# Altium PCB CTRL_Board.PcbDoc
Units mm, origin at the board's own origin, x right, y up, seen from the top; angles counter-clockwise.
Board outline 55 x 35 mm, 4 copper layers (Top Layer, 3V3, GND, Bottom Layer), stack 1.781 mm thick; 57 components, 44 nets, 231 pads, 53 vias.
Unrouted connection lines stored in the file: 6.
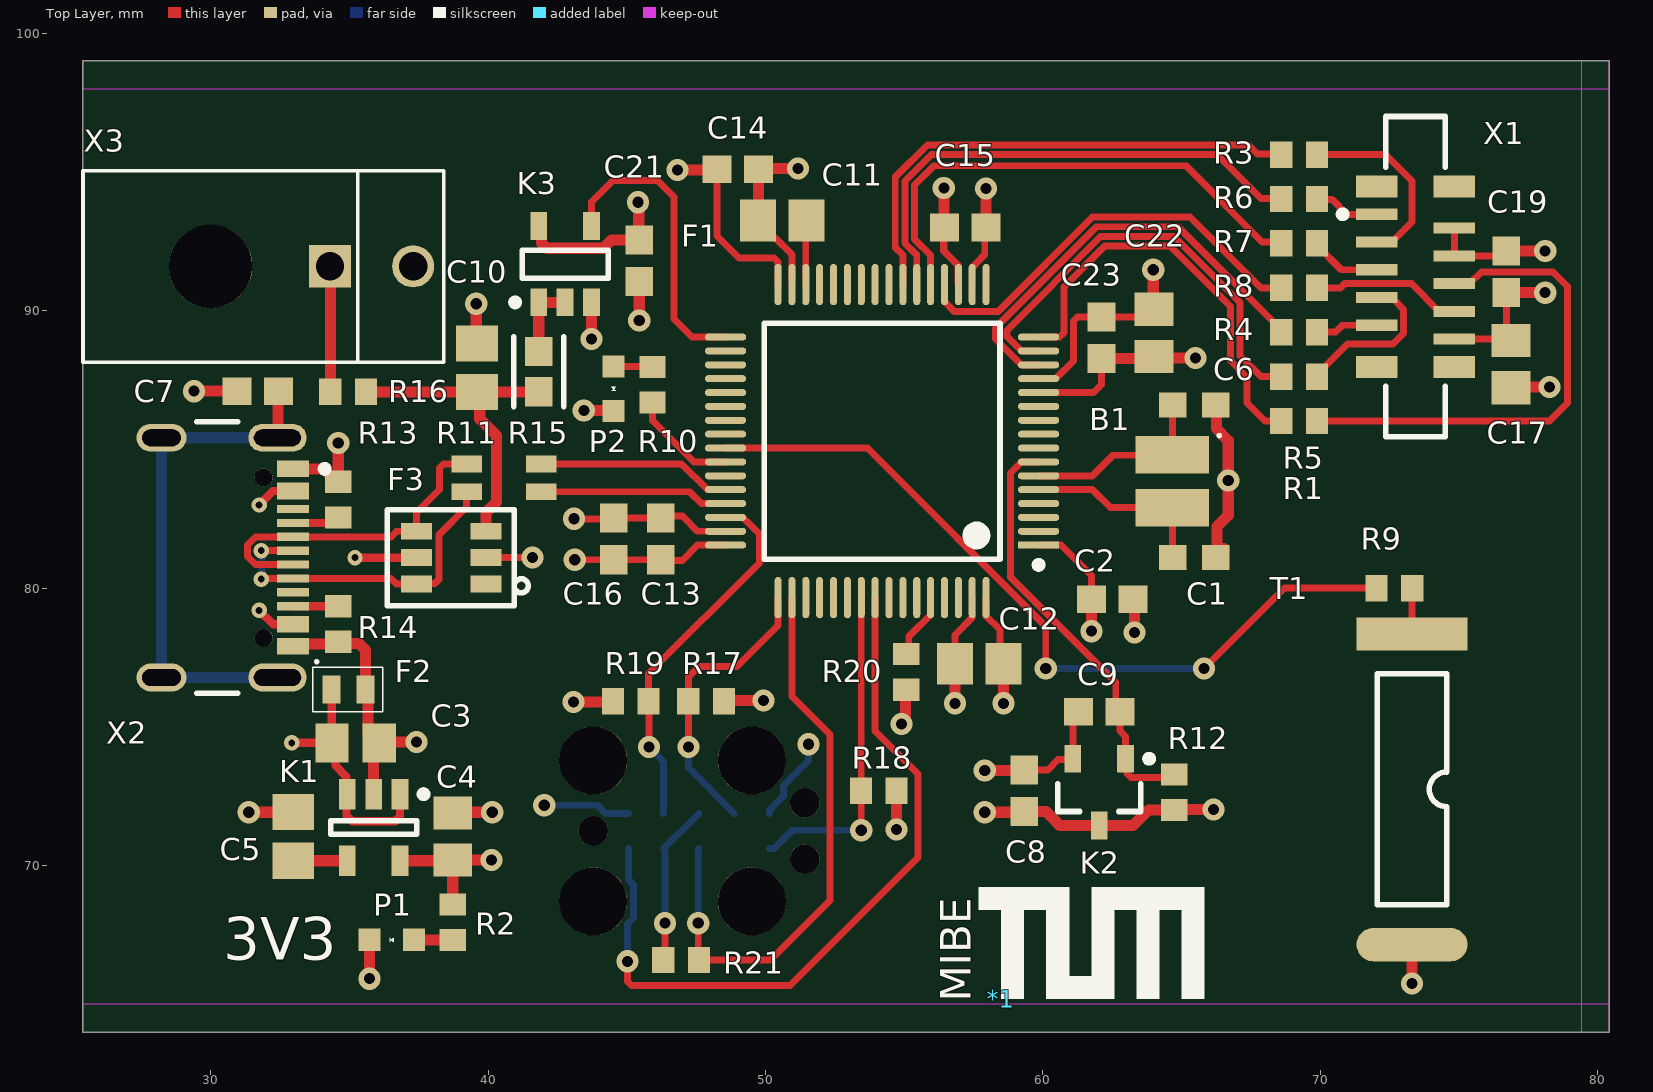
[diagram p0: Top Layer view]
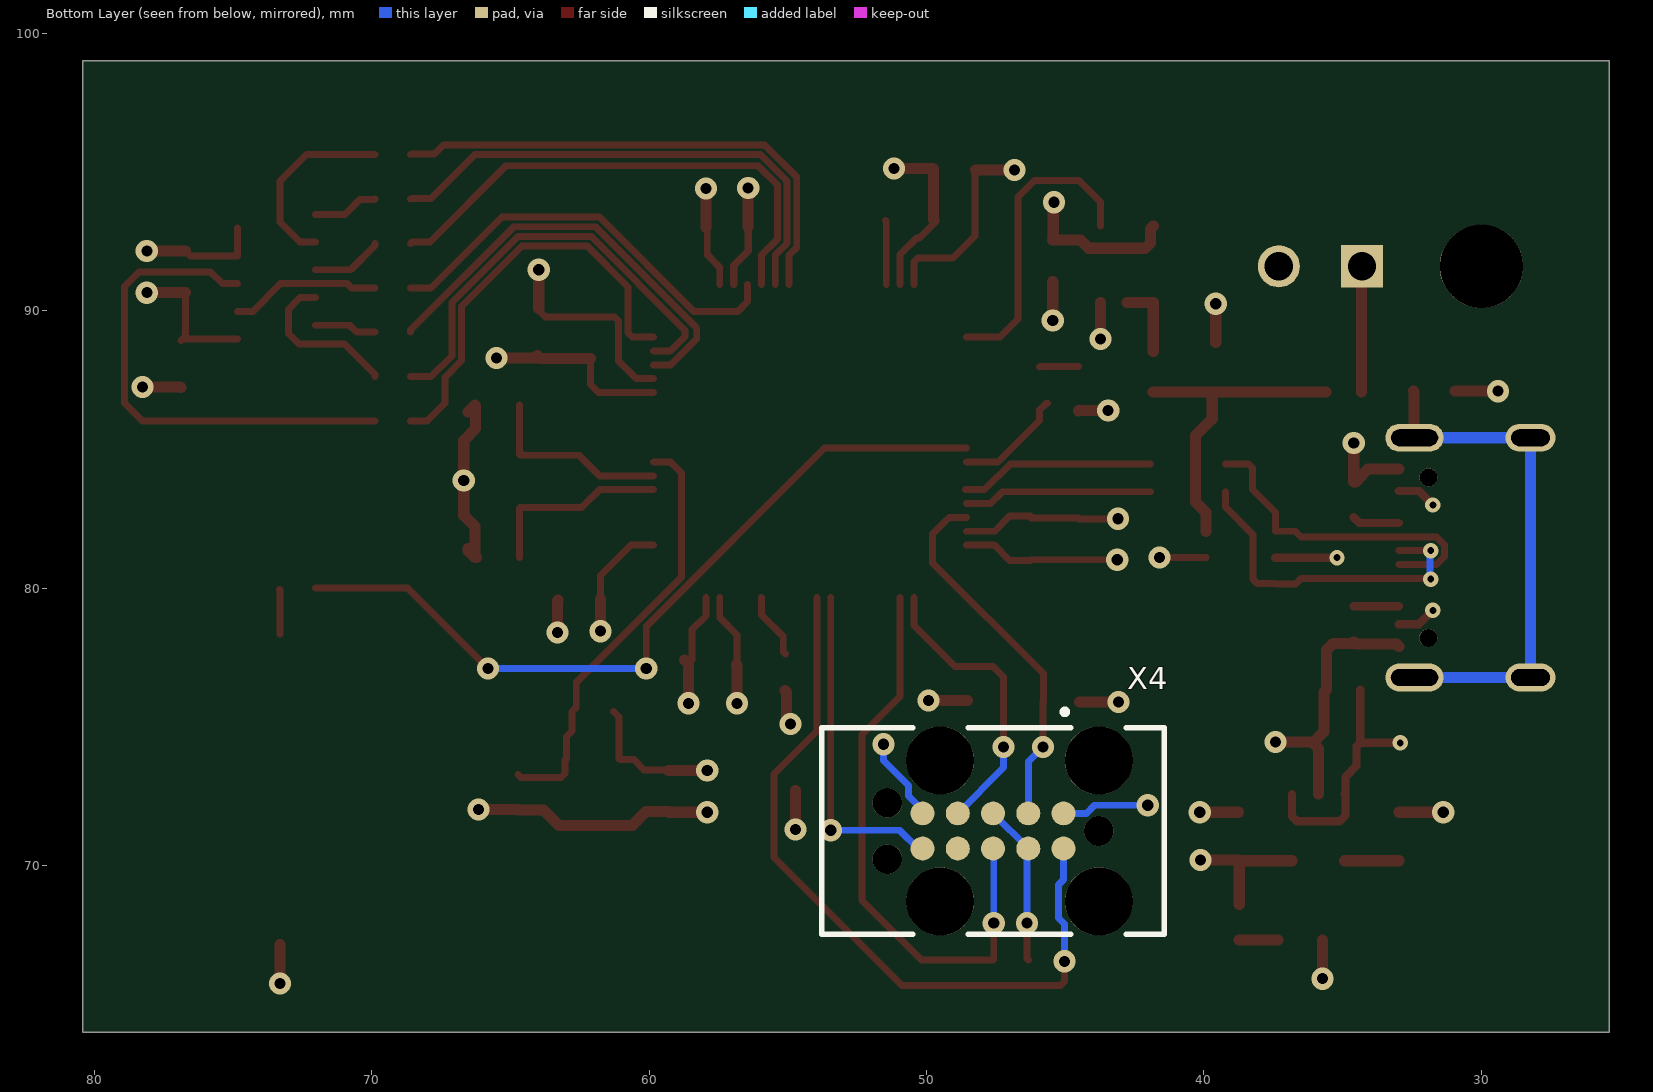
[diagram p1: Bottom Layer view, seen from below]
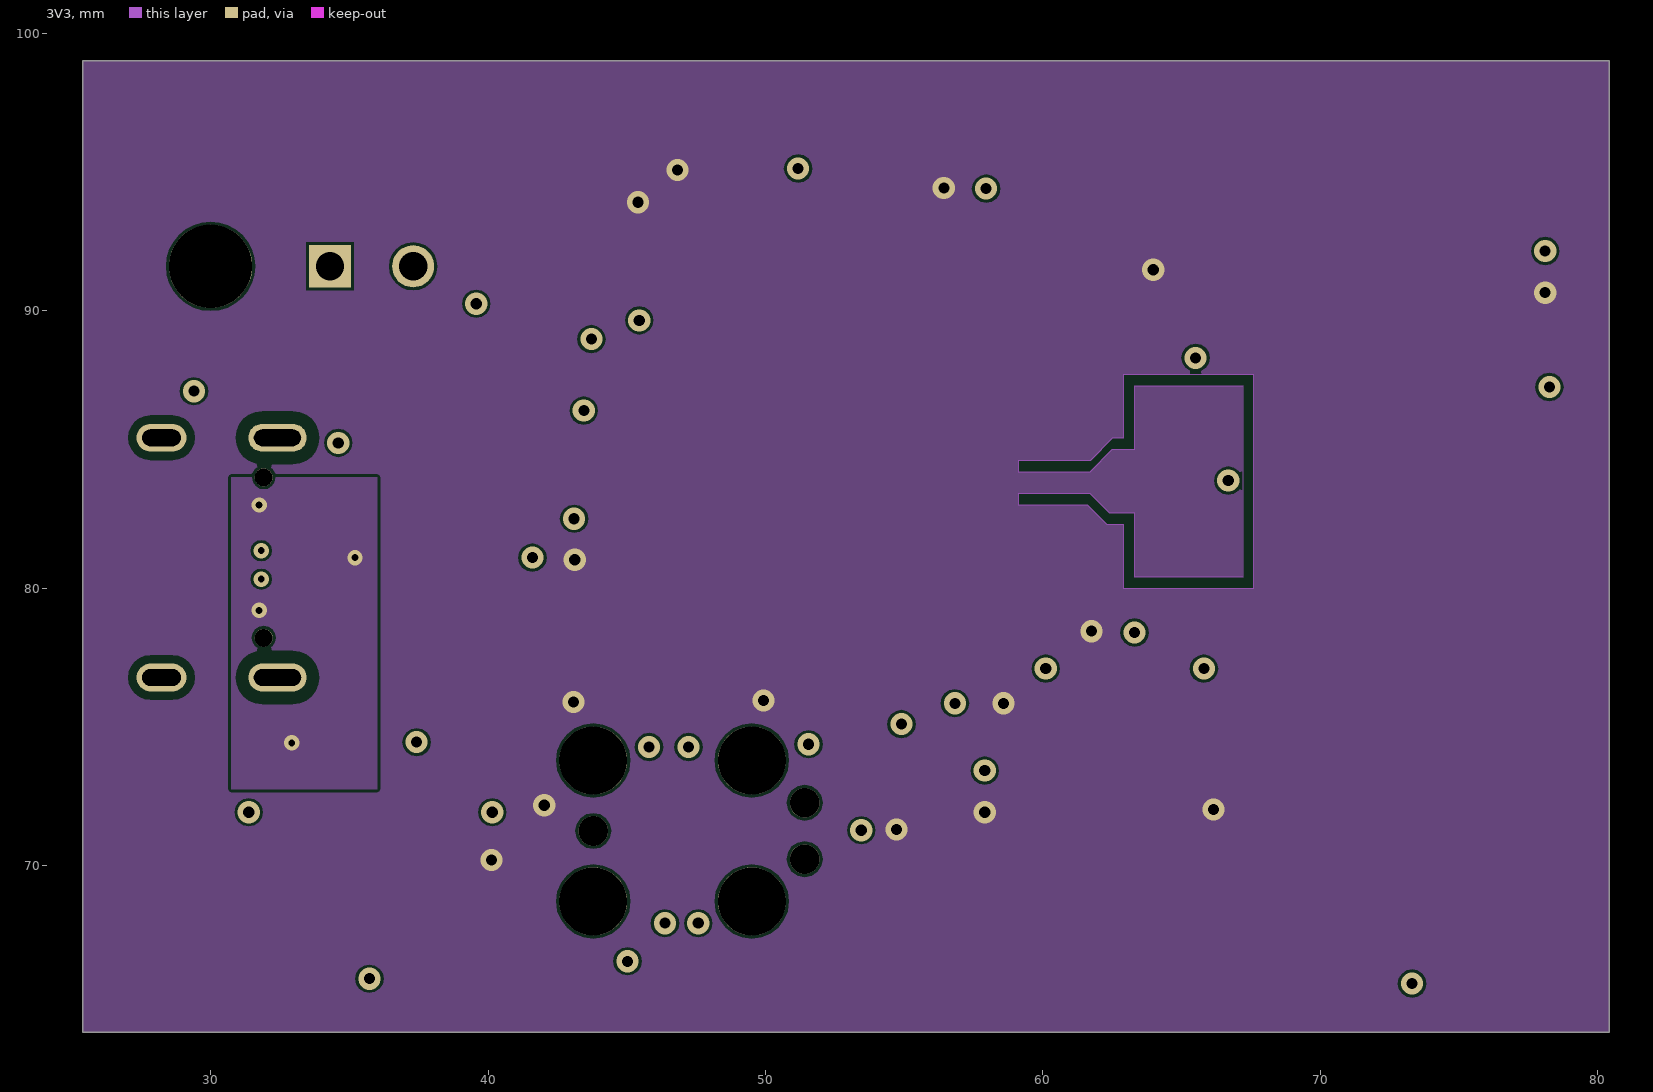
[diagram p2: 3V3]
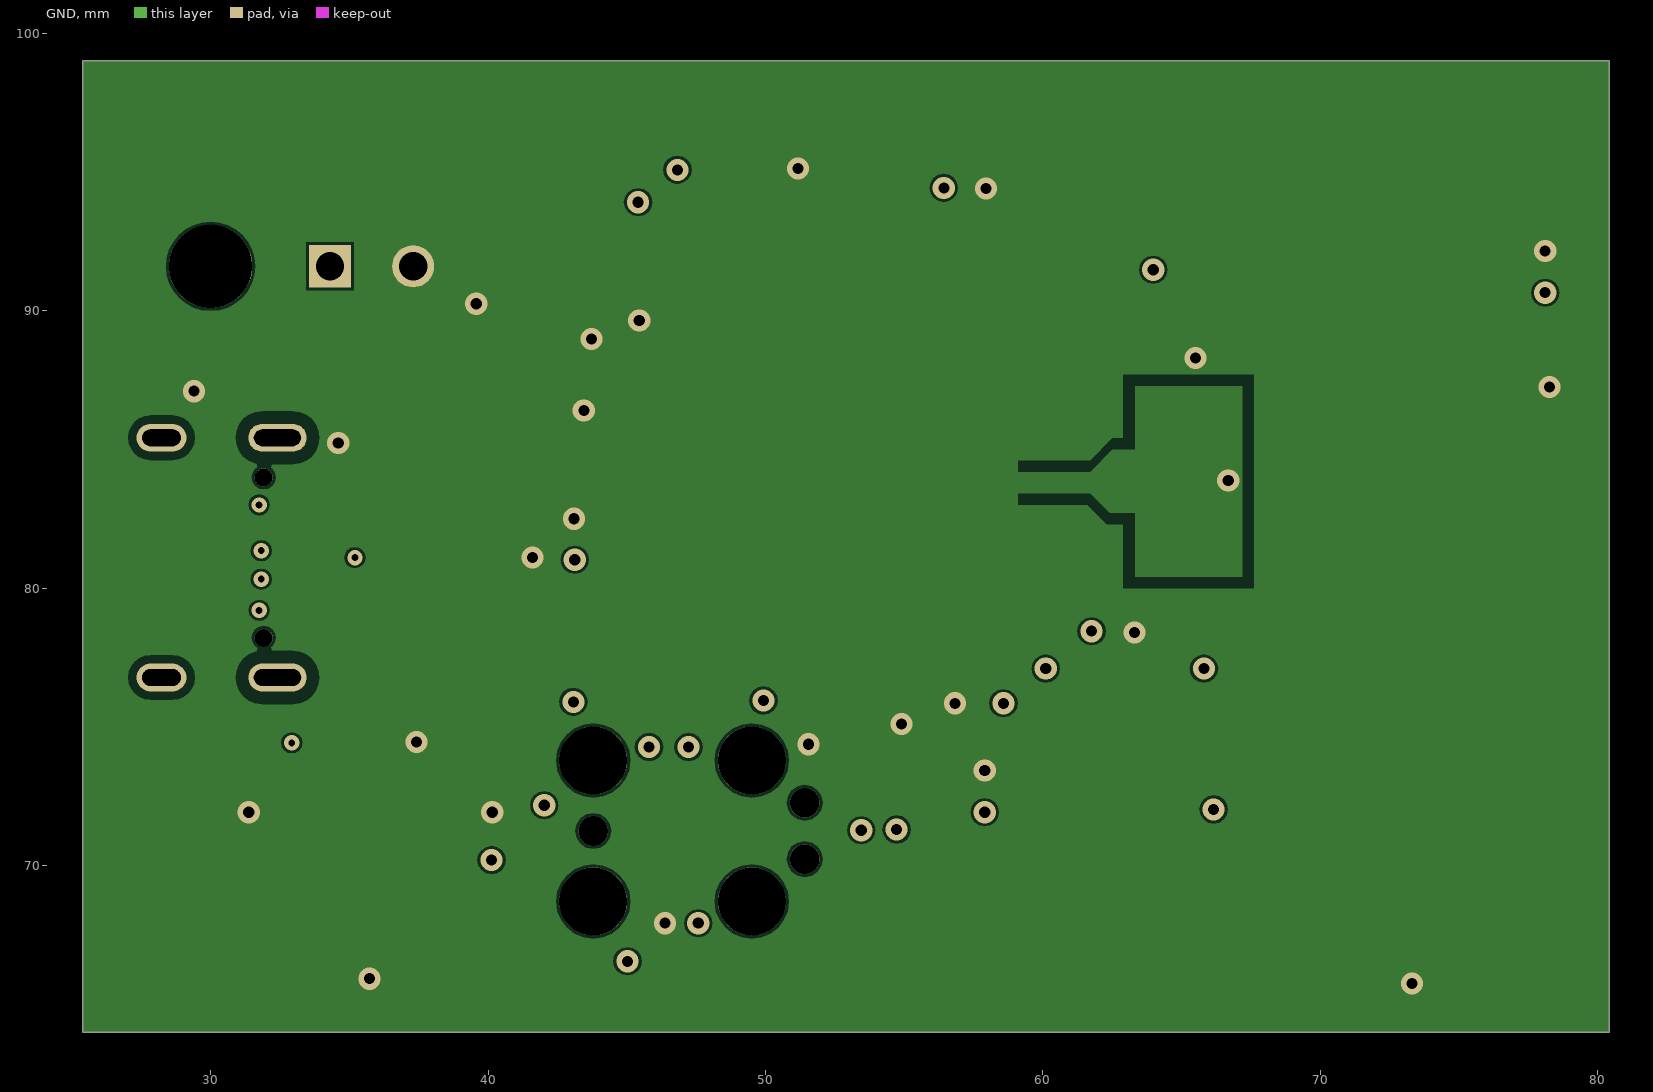
[diagram p3: GND]
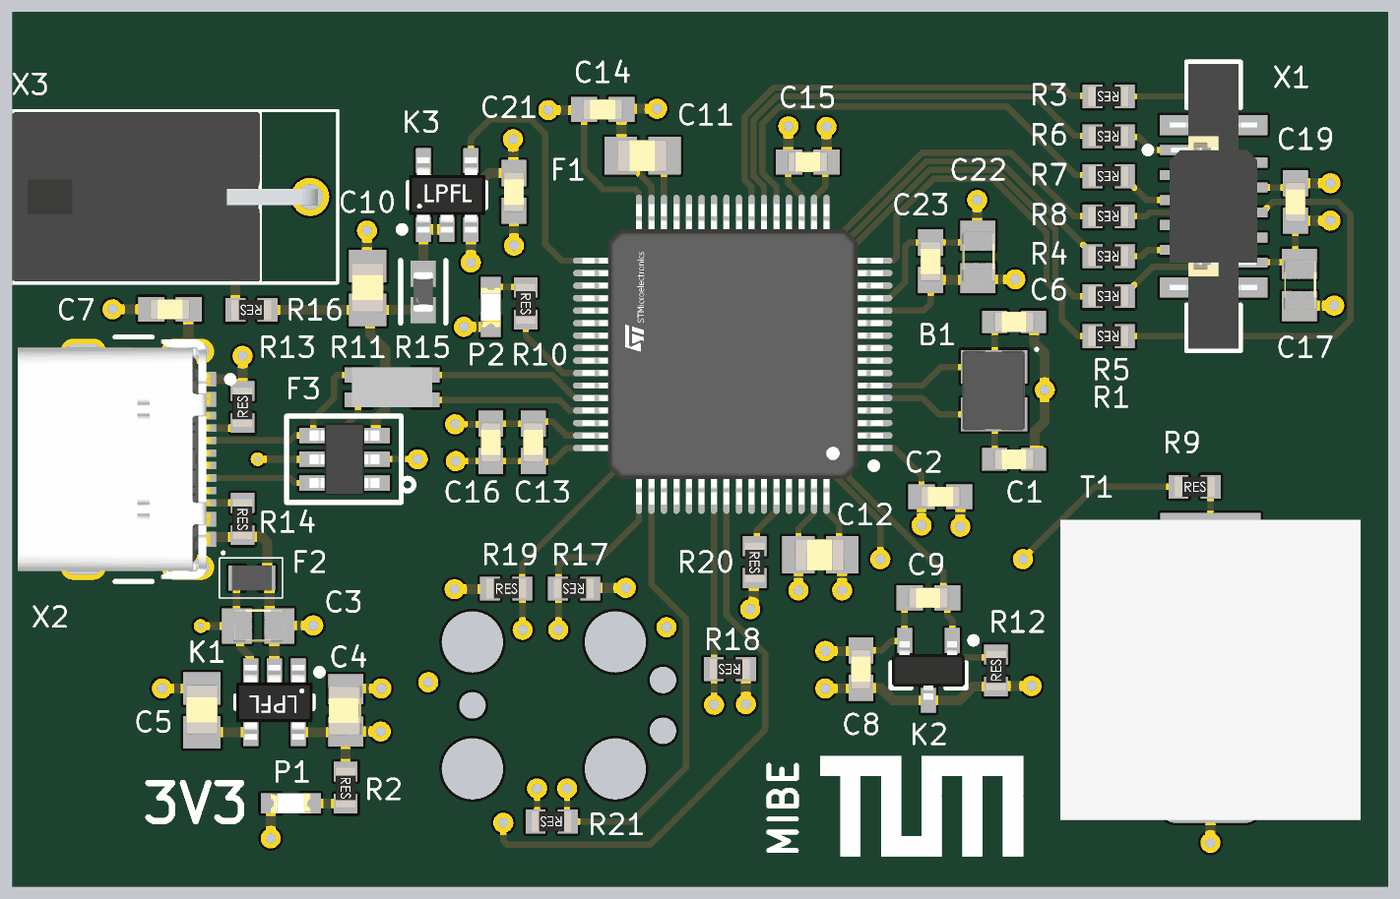
[diagram p4: 3D render of the assembled board from above, using the file's embedded part models]

## Layer stack, top to bottom
Top Solder: solder mask 0.0254, SM-001, Dk 4
Top Layer: signal copper 0.035
Dielectric 2: prepreg 0.0711, PP-006, Dk 4.1
3V3: signal copper 0.035
Dielectric 1: core 1.4986, Core-043, Dk 4.3
GND: signal copper 0.035
Dielectric 3: prepreg 0.0711, PP-006, Dk 4.1
Bottom Layer: signal copper 0.035
Bottom Solder: solder mask 0.0254, SM-001, Dk 4

## Board outline
25.4,64 80.4,64 80.4,99 25.4,99

## Design rules (kind name [scope] priority, off if disabled: settings)
Clearance [All] p1: gap=0.1 ignorepadtopadclearanceinfootprint=TRUE
DiffPairsRouting [All] p1: maxlimit=0.254 minlimit=0.254 mostfreqgap=0.254 toplayer_minwidth=0 toplayer_maxwidth=0.381 toplayer_prefwidth=0.381 midlayer1_minwidth=0 midlayer1_maxwidth=0.381 midlayer1_prefwidth=0.381 midlayer2_minwidth=0 midlayer2_maxwidth=0.381 midlayer2_prefwidth=0.381 bottomlayer_minwidth=0 bottomlayer_maxwidth=0.381 bottomlayer_prefwidth=0.381 maxuncoupledlength=12.7
HoleSize [All] p1: absolutevalues=TRUE maxlimit=10 minlimit=0.025 maxpercent=80.000 minpercent=20.000
MinimumSolderMaskSliver [All] p1: minsoldermaskwidth=0.03
PolygonConnect [All] p1: connectstyle=Direct reliefconductorwidth=0.254 reliefentries=4 polygonreliefangle="90 Angle" airgapwidth=0.254
RoutingVias [All] p1: holewidth=0 width=0 viastyle="Through Hole" minholewidth=0 minwidth=0 maxholewidth=1 maxwidth=1
SilkToSilkClearance [All] p1: silktosilkclearance=0
SilkToSolderMaskClearance [IsPad] p1: minsilkscreentomaskgap=0 clearancetoexposedcopper=TRUE
SolderMaskExpansion [All] p1: expansion=0.102 istentingtop=FALSE
Width [All] p1: maxlimit=5 minlimit=0.15 preferedwidth=0.254
25 further rules are at their usual default settings.

## Classes and differential pairs
differential pair USB: +USB_P -USB_N

## Components (designator, comment, footprint, x,y, rotation, side; value= is the part's Value field where it differs from the comment)
*1 "TUM & MIBE Logo" "TUM & MIBE Logo" 58.5,65.2 r0 top
B1 "8 MHz" DFN190P320X100-2N 64.65,83.85 r270 top
C1 "8.2 pF" CAPC1608X09N 65.45,81.1 r180 top
C2 "100n" CAPC1608X08N 62.5,79.6 r0 top
C3 "1 µF" CAPC2012X14N 35.225,74.425 r0 top
C4 "1 µF" CAPC2012X14N 38.725,71.05 r90 top
C5 "10 nF" CAPC2012X09N 32.975,71.05 r90 top
C6 "8.2 pF" CAPC1608X09N 65.45,86.6 r180 top
C7 "10 nF" "0603 (1608x90N), h = 0.9 mm" 31.7,87.1 r0 top
C8 "100n" CAPC1608X08N 59.325,72.7 r90 top
C9 "100n" CAPC1608X08N 62.025,75.55 r180 top
C10 "10 nF" CAPC2012X09N 39.6,87.95 r90 top
C11 "4.7uF" CAPC2012X09N 50.6,93.25 r180 top
C12 "4.7uF" CAPC2012X09N 57.7,77.275 r180 top
C13 "100n" CAPC1608X08N 46.225,81.775 r90 top
C14 "100n" CAPC1608X08N 49,95.1 r0 top
C15 "100n" CAPC1608X08N 57.2,93 r0 top
C16 "100n" CAPC1608X08N 44.525,81.775 r90 top
C17 "10µ" CAPC2012X14N 76.862,88.075 r270 top
C19 "100n" CAPC1608X08N 76.7,91.4 r90 top
C21 "100n" CAPC1608X08N 45.45,91.8 r270 top
C22 "10µ" CAPC2012X14N 64,89.2 r270 top
C23 "100n" CAPC1608X08N 62.108,89.025 r270 top
F1 "STM32F401RET6" LQFP-64 54.2,85.3 r180 top
F2 "uClamp0571P" DFN110P160X55-2N 34.975,76.35 r0 top
F3 "824015" SOT23_6L 38.675,81.1 r180 top
K1 "TPS73233DBVT" SOT95P280X145-5N#1 35.875,71.375 r270 top
K2 "STM1061N29WX6F" SOT95P237X112-3N 62.025,72.65 r270 top
K3 "SN74AHC1G08DBVR" SOT95P280X145-5N#2 42.775,91.675 r90 top
P1 "green" WL-SMCW_0603 36.525,67.325 r0 top
P2 "green" WL-SMCW_0603 44.525,87.19 r90 top
R1 "100R" RESC1608X05N 69.225,86.025 r180 top
R2 "3k3" RESC1608X05N 38.725,67.95 r270 top
R3 "100R" RESC1608X05N 69.225,95.625 r180 top
R4 "100R" RESC1608X05N 69.225,89.225 r180 top
R5 "100R" RESC1608X05N 69.225,87.625 r180 top
R6 "100R" RESC1608X05N 69.225,94.025 r180 top
R7 "100R" RESC1608X05N 69.225,92.425 r180 top
R8 "100R" RESC1608X05N 69.225,90.825 r180 top
R9 "1k" RESC1608X05N 72.675,80 r0 top
R10 "3k3" RESC1608X05N 45.925,87.325 r270 top
R11 "90 Ohm" "WE-CNSW, 1206" 40.575,83.975 r180 top
R12 "10k" RESC1608X05N 64.725,72.65 r90 top
R13 "5k1" RES0603 34.6,83.2 r90 top
R14 "5k1" RES0603 34.6,78.7 r270 top
R15 "300R" "0603 (WE-CBF)" 41.825,87.8 r270 top
R16 "100R" RESC1608X05N 34.95,87.075 r180 top
R17 "10k" RESC1608X05N 47.85,75.925 r180 top
R18 "10k" RESC1608X05N 54.075,72.7 r180 top
R19 "10k" RESC1608X05N 45.15,75.925 r0 top
R20 "10k" RESC1608X05N 55.075,76.975 r270 top
R21 "10k" RESC1608X05N 46.95,66.6 r180 top
T1 "Summer" PKLCS1212E4001-R1 73.3,78.35 r270 top
X1 "687310124422" 687310124422 73.425,91.225 r270 top
X2 "USB 2.0 Type-C" 629722000214 29.375,81.1 r270 top
X3 "66200221022" 66200221022 33.65,91.6 r270 top
X4 "TC2050-IDC" TC2050-IDC 46.647,68.709 r0 bottom

## Footprints (in the part's own frame and the unit in brackets; to place one, negate y for a bottom-side part, rotate by r counter-clockwise, add the part's x,y. Pads: shape width x height; smd on the part's side, far side on the other; paste and mask are expansions set on the pad)
"0603 (1608x90N), h = 0.9 mm" [mm] "Chip Capacitor, 2-Leads, Body 1,60x0,80mm, IPC Medium Density"
  rect 1.05x1 smd: 1(-0.75,0) 2(0.75,0)
  body extent -0.8,-0.41 0.8,0.41, height 0.82
"0603 (WE-CBF)" [mm]
  rect 1.055x1.006 smd paste+0 mask+0: 1(-0.726,0) 2(0.726,0)
  silkscreen extent -1.25,-0.9 1.25,0.9, body extent -1.5,-0.75 1.5,0.75, height 0.25
66200221022 [mm] "Dual row Right angle header With plastic peg 02p"
  rect 1.52x1.52 hole 1.02: 1(0,0.65)
  round 1.52 hole 1.02: 2(0,3.65)
  round 3 hole 3 unplated: ""(0,-3.65)
  silkscreen extent -3.45,-8.25 3.45,4.75, body extent -3.35,-8.25 3.35,3.97, height 8.78
629722000214 [mm]
  rrect100% 1x2.1 hole 1.7 slot 0.6 at 0 deg paste-1000 mask+0: 1(-4.32,3.035) 1(4.32,3.035)
  rrect100% 1x1.8 hole 1.4 slot 0.6 at 0 deg paste-1000 mask+0: 1(-4.32,-1.145) 1(4.32,-1.145)
  rect 0.3x1.15 smd paste+0 mask+0: A5(-1.25,3.6) A6(-0.25,3.6) A7(0.25,3.6) A8(1.25,3.6) B5(1.75,3.6) B6(0.75,3.6) B7(-0.75,3.6) B8(-1.75,3.6)
  rect 0.6x1.15 smd paste+0 mask+0: GND(-3.2,3.6) GND(3.2,3.6) VBUS(-2.4,3.6) VBUS(2.4,3.6)
  round 0.65 hole 0.65 unplated paste-1000 mask+0: ""(-2.89,2.535) ""(2.89,2.535)
  silkscreen extent -4.89,0.13 4.89,4.86, body extent -4.99,-3.97 4.99,4.28, height 0.25
687310124422 [mm] "ZIF Connectors, Vertical, Type A, pitch 0.5mm, 10p"
  rect 0.4x1.5 smd: 1(-2.25,-1.4) 2(-1.75,1.4) 3(-1.25,-1.4) 4(-0.75,1.4) 5(-0.25,-1.4) 6(0.25,1.4) 7(0.75,-1.4) 8(1.25,1.4) 9(1.75,-1.4) 10(2.25,1.4)
  rect 0.8x1.5 smd: MP1(-3.25,-1.4) MP2(-3.25,1.4) MP3(3.25,-1.4) MP4(3.25,1.4)
  silkscreen extent -5.77,-2.75 5.78,1.07, body extent -5.7,-1.75 5.7,1.75, height 4.92
CAPC1608X08N [mm] "Chip Capacitor, 2-Leads, Body 1,60x0,80mm, IPC Medium Density"
  rect 1.05x1 smd: 1(-0.75,0) 2(0.75,0)
  body extent -0.8,-0.41 0.8,0.41, height 0.82
CAPC1608X09N [mm] "Chip Capacitor, 2-Leads, Body 1,60x0,80mm, IPC Medium Density"
  rect 1x0.9 smd: 1(-0.775,0) 2(0.775,0)
  body extent -0.8,-0.41 0.8,0.41, height 1.12
CAPC2012X09N [mm] "Chip Capacitor, 2-Leads, Body 2,00x1,25mm, IPC Medium Density"
  rect 1.3x1.5 smd: 1(-0.875,0) 2(0.875,0)
  body extent -0.97,-0.63 1.03,0.64, height 0.92
CAPC2012X14N [mm] "Chip Capacitor, 2-Leads, Body 2,00x1,25mm, IPC Medium Density"
  rect 1.2x1.4 smd: 1(-0.85,0) 2(0.85,0)
  body extent -1,-0.63 1,0.69, height 1.42
DFN110P160X55-2N [mm] "DFN, 2-Leads, Body 1,00x1,60mm, Pitch 1,10mm, IPC Medium Density"
  rect 0.65x1 smd: 1(-0.613,0) 2(0.613,0)
  silkscreen extent -1.3,-0.8 1.22,1.05, body extent -0.8,-0.5 0.8,0.5, height 0.56
DFN190P320X100-2N [mm] "DFN, 2-Leads, Body 2,50x3,20mm, Pitch 1,90mm, IPC Medium Density"
  rect 1.35x2.65 smd: 1(-0.95,0) 2(0.95,0)
  silkscreen extent -1.7,1.65 -1.6,1.75, body extent -1.6,-1.27 1.6,1.23, height 1.1
LQFP-64 [mm]
  rect 1.488x0.252 smd paste+0 mask+0: 1(-5.641,3.75)
  rrect100% 1.488x0.252 smd paste+0 mask+0: 2(-5.641,3.25) 3(-5.641,2.75) 4(-5.641,2.25) 5(-5.641,1.75) 6(-5.641,1.25) 7(-5.641,0.75) 8(-5.641,0.25) 9(-5.641,-0.25) 10(-5.641,-0.75) 11(-5.641,-1.25) 12(-5.641,-1.75) 13(-5.641,-2.25) 14(-5.641,-2.75) 15(-5.641,-3.25) 16(-5.641,-3.75) 33(5.641,-3.75) 34(5.641,-3.25) 35(5.641,-2.75) 36(5.641,-2.25) 37(5.641,-1.75) 38(5.641,-1.25) 39(5.641,-0.75) 40(5.641,-0.25) 41(5.641,0.25) 42(5.641,0.75) 43(5.641,1.25) 44(5.641,1.75) 45(5.641,2.25) 46(5.641,2.75) 47(5.641,3.25) 48(5.641,3.75)
  rrect100% 0.252x1.488 smd paste+0 mask+0: 17(-3.75,-5.641) 18(-3.25,-5.641) 19(-2.75,-5.641) 20(-2.25,-5.641) 21(-1.75,-5.641) 22(-1.25,-5.641) 23(-0.75,-5.641) 24(-0.25,-5.641) 25(0.25,-5.641) 26(0.75,-5.641) 27(1.25,-5.641) 28(1.75,-5.641) 29(2.25,-5.641) 30(2.75,-5.641) 31(3.25,-5.641) 32(3.75,-5.641) 49(3.75,5.641) 50(3.25,5.641) 51(2.75,5.641) 52(2.25,5.641) 53(1.75,5.641) 54(1.25,5.641) 55(0.75,5.641) 56(0.25,5.641) 57(-0.25,5.641) 58(-0.75,5.641) 59(-1.25,5.641) 60(-1.75,5.641) 61(-2.25,5.641) 62(-2.75,5.641) 63(-3.25,5.641) 64(-3.75,5.641)
  silkscreen extent -5.77,-4.25 4.25,4.58, body extent -6.64,-6.64 6.64,6.64, height 0.25
PKLCS1212E4001-R1 [mm]
  rect 1.2x4 smd: 1(0,0)
  oval 1.2x4 smd: 2(11.2,0)
  silkscreen extent 1.43,-1.25 9.77,1.25, body extent -0.32,-6 11.68,6, height 3
RES0603 [mm] "Chip Resistor, 2-Leads, Body 1,58x0,85mm, IPC Medium Density"
  rect 0.8x0.95 smd: 1(-0.65,0) 2(0.635,0)
  body extent -0.8,-0.4 0.8,0.4, height 0.45
RESC1608X05N [mm] "Chip Resistor, 2-Leads, Body 1,58x0,85mm, IPC Medium Density"
  rect 0.8x0.95 smd: 1(-0.65,0) 2(0.635,0)
  body extent -0.8,-0.4 0.8,0.4, height 0.45
SOT23_6L [mil] "SOT23, 6-Leads, Body 3.60x2.9mm, Pitch 0.95mm"
  rect 44x24 smd: 1(-49.21,37.4) 2(-49.21,0) 3(-49.21,-37.4) 4(49.21,-37.4) 5(49.21,0) 6(49.21,37.4)
  silkscreen extent -109,-68 91,68, body extent -55,-57 55,57, height 44
SOT95P237X112-3N [mm] "SOT23, 3-Leads, Body 2,92x2,37mm, Pitch 0,95mm, IPC Medium Density"
  rect 1x0.6 smd: 1(-1.2,0.95) 2(-1.2,-0.95) 3(1.2,0)
  silkscreen extent -1.32,-1.5 0.7,1.93, body extent -1.17,-1.46 1.17,1.46, height 1
SOT95P280X145-5N#1 [mm] "SOT23, 5-Leads, Body 2,90x2,80mm, Pitch 0,95mm, IPC Medium Density"
  rect 1.1x0.6 smd: 1(-1.2,0.95) 2(-1.2,0) 3(-1.2,-0.95) 4(1.2,-0.95) 5(1.2,0.95)
  silkscreen extent -1.32,-1.55 0.25,1.93, body extent -1.5,-1.52 1.5,1.52, height 1.45
SOT95P280X145-5N#2 [mm] "SOT23, 5-Leads, Body 2,90x2,80mm, Pitch 0,95mm, IPC Medium Density"
  rect 1x0.6 smd: 1(-1.375,0.95) 2(-1.375,0) 3(-1.375,-0.95) 4(1.375,-0.95) 5(1.375,0.95)
  silkscreen extent -1.5,-1.55 0.5,1.92, body extent -1.5,-1.52 1.5,1.52, height 1.45
TC2050-IDC [mil]
  round 34 smd: 1(-62.5,-125) 2(-12.5,-125) 3(37.5,-125) 4(87.5,-125) 5(137.5,-125) 6(137.5,-75) 7(87.5,-75) 8(37.5,-75) 9(-12.5,-75) 10(-62.5,-75)
  round 42 hole 42 unplated: 11(-112.5,-100) 12(187.5,-60.04) 13(187.5,-139.96)
  round 96.5 hole 96.5 unplated: 14(112.5,-200) 15(-112.5,-200) 16(-112.5,0) 17(112.5,0)
  silkscreen extent -205,-273 280,47
"TUM & MIBE Logo" [mm]
  silkscreen extent -0.81,0 7.32,4.03
"WE-CNSW, 1206" [mm] "SMD Inductor, 4-Leads, Body 1,8x3,4mm"
  rect 1.1x0.6 smd: 1(-1.35,0.5) 2(1.35,0.5) 3(1.35,-0.5) 4(-1.35,-0.5)
  body extent -1.6,-0.8 1.6,0.8, height 1.88
WL-SMCW_0603 [mm] "SMD Mono-color Chip LED, body 1.6x0.8mm"
  rect 0.8x0.8 smd: 1(-0.8,0) 2(0.8,0)
  silkscreen extent -0.05,-0.08 0.08,0.08, body extent -0.8,-0.4 0.8,0.4, height 0.7

## Part data
B1: library part NX3225GD-8MHZ-STD-CRA-3, "Crystal, 8 MHz, 8 pF, NX3225GD", ComponentLink1Description=Datasheet, ComponentLink1URL=http://www.ndk.com/images/products/catalog/c_NX3225GD-STD-CRA-3_e.pdf
C1 C6: library part C0603C829C5GACTU, "8.2 pF, 50 V, 5%, C0G, 0805", Supplier Part Number 1=1865471, ComponentLink1Description=datasheet, ComponentLink1URL=http://www.farnell.com/datasheets/1691965.pdf?src-supplier=Element14, PackageDescription="Chip Capacitor, 2-Leads, Body 2,00x1,25mm, IPC Medium Density", PackageReference=0805, Supplier 1=Farnell
C2 C8 C9 C19 C21 C23: library part C0603C104K5RACTU, "100n, 0603, X7R, 10%, 50 V", Dielectric=X7R, Manufacturer=Kemet, Supplier Part Number 1=399-5089-1-ND, Tolerance=10%, Voltage Rating="50 V", ComponentLink1Description=Datasheet, ComponentLink1URL=http://www.farnell.com/datasheets/1851736.pdf, Supplier 1=Digi-Key, Supplier 2=Farnell, Supplier 3=Mouser, Supplier Part Number 2=1288255, Supplier Part Number 3=80-C0603C104K5R
C3 C4: library part C0805C105K3RACTU, "1 µF, 25 V, 10%, X7R, 0805", Supplier Part Number 1=399-8004-6-ND, ComponentLink1Description=datasheet, ComponentLink1URL=https://content.kemet.com/datasheets/KEM_C1002_X7R_SMD.pdf, PackageDescription="Chip Capacitor, 2-Leads, Body 2,00x1,25mm, IPC Medium Density", PackageReference=0805, Supplier 1=Digi-Key, Supplier 2=Farnell, Supplier 3=Mouser, Supplier Part Number 2=1637035, Supplier Part Number 3=80-C0805C105K3R
C5 C10: library part C0805C103K5RACTU, "10 nF, 50 V, 10%, X7R, 0805", Supplier Part Number 1=1414662, ComponentLink1Description=datasheet, ComponentLink1URL=https://datasheet.octopart.com/C0805C103K5RAC-TU-Kemet-datasheet-5313890.pdf, PackageDescription="Chip Capacitor, 2-Leads, Body 2,00x1,25mm, IPC Medium Density", PackageReference=0805, Supplier 1=Farnell
C7: library part CC0603KRX7R9BB103, "10 nF, 50 V, 10%, X7R, 0603", Capacitance=10nF, Case Code (Imperial)=0603, Case Code (Metric)=1608, Dielectric=X7R, Insulation Resistance=100GR, Manufacturer=Yageo, Max Operating Temperature=125°C, Min Operating Temperature=-55°C, Package Quantity=1, Resistor Type=Ceramic, Tolerance=10%, Voltage=50V, Case/Package=0603, Category="Ceramic Capacitors", ComponentLink1Description=https://datasheet.ciiva.com/11788/0900766b8079c870-11788374.pdf?src-supplier=Rs, ComponentLink1URL=https://datasheet.ciiva.com/11788/0900766b8079c870-11788374.pdf?src-supplier=Rs, ComponentLink2Description=https://datasheet.ciiva.com/26862/getdatasheetpartid-403582-26862846.pdf?src-supplier=Verical, ComponentLink2URL=https://datasheet.ciiva.com/26862/getdatasheetpartid-403582-26862846.pdf?src-supplier=Verical, ComponentLink3Description=https://datasheet.ciiva.com/8033/70765-8033817.pdf?src-supplier=Element14, ComponentLink3URL=https://datasheet.ciiva.com/8033/70765-8033817.pdf?src-supplier=Element14, ComponentLink4Description=https://datasheet.ciiva.com/28450/1489800-28450619.pdf?src-supplier=Element14, ComponentLink4URL=https://datasheet.ciiva.com/28450/1489800-28450619.pdf?src-supplier=Element14, ComponentLink5Description=https://datasheet.ciiva.com/176/mlccorderingcode-176551.pdf?src-supplier=Digi-Key, ComponentLink5URL=https://datasheet.ciiva.com/176/mlccorderingcode-176551.pdf?src-supplier=Digi-Key, ComponentLink6Description=https://datasheet.ciiva.com/176/mlccorderingcode-176550.pdf?src-supplier=Digi-Key, ComponentLink6URL=https://datasheet.ciiva.com/176/mlccorderingcode-176550.pdf?src-supplier=Digi-Key, ComponentLink7Description=https://datasheet.ciiva.com/176/mlccorderingcode-176552.pdf?src-supplier=Digi-Key, ComponentLink7URL=https://datasheet.ciiva.com/176/mlccorderingcode-176552.pdf?src-supplier=Digi-Key, ComponentLink8Description=https://datasheet.ciiva.com/13389/upy-gphc-x7r-6-3v-to-50v-8-13389991.pdf?src-supplier=Mouser, ComponentLink8URL=https://datasheet.ciiva.com/13389/upy-gphc-x7r-6-3v-to-50v-8-13389991.pdf?src-supplier=Mouser, ComponentLink9Description=https://datasheet.ciiva.com/8033/1734573-8033816.pdf?src-supplier=Element14, ComponentLink9URL=https://datasheet.ciiva.com/8033/1734573-8033816.pdf?src-supplier=Element14, ComponentLink10Description=https://datasheet.ciiva.com/8033/1734573-8033861.pdf?src-supplier=Element14, ComponentLink10URL=https://datasheet.ciiva.com/8033/1734573-8033861.pdf?src-supplier=Element14, Depth=0.8mm, Halogen Free="Halogen Free", Height=0.8mm, Lead Free="Lead Free", Length=1.6mm, Manufacturer Part Number=CC0603KRX7R9BB103, Material=Ceramic, Mount="Surface Mount", Number of Pins=2, Packaging="Tape and Reel", Pricing 1="4000=0,00400, 20000=0,00380, 80000=0,00360, 200000=0,00350, 500000=0,00320 (USD)", Radiation Hardening=No, RoHS=Yes, RoHS Compliant=Yes, Series=CC, Stock 1=11624000, Supplier 1="Future Electronics", Termination=SMD/SMT, Thickness=0.035inch, Voltage Rating=50V, Voltage Rating (DC)=50V, Width=0.031inch
C11 C12: library part C0805C475K4PACTU, "4.7 µF, ± 10%, X5R, 16 V, 0805", Supplier Part Number 1=399-8101-2-ND, ComponentLink1Description=datasheet, ComponentLink1URL=http://www.farnell.com/datasheets/2739660.pdf?_ga=2.240630531.1432735279.1579189766-674608839.1579189766&_gac=1.140641798.1579263811.EAIaIQobChMIzJSvkNCK5wIVleJ3Ch2EjwqfEAAYASAAEgKpevD_BwE, PackageDescription="Chip Capacitor, 2-Leads, Body 2,00x1,25mm, IPC Medium Density", PackageReference=0805, Supplier 1=Digi-Key, Supplier 2=Farnell, Supplier Part Number 2=9227849
C13 C14 C15 C16: library part C0603C104K5RACTU, "100n, 0603, X7R, 10%, 50 V", Dielectric=X7R, Manufacturer=Kemet, Tolerance=10%, Voltage Rating="50 V", ComponentLink1Description=Datasheet, ComponentLink1URL=http://www.farnell.com/datasheets/1851736.pdf
C17 C22: library part C0805C106K4PACTU, "10µ, 0805, X5R, 10%, 16 V", Dielectric=X5R, Manufacturer=Kemet, Supplier Part Number 1=399-8012-1-ND, Tolerance=10%, Voltage Rating="16 V", ComponentLink1Description=Datasheet, ComponentLink1URL=http://www.farnell.com/datasheets/1732713.pdf, Supplier 1=Digi-Key, Supplier 2=Farnell, Supplier 3=Mouser, Supplier Part Number 2=1288204, Supplier Part Number 3=80-C0805C106K4P
F1: "M4, 512 kB, 84 MHz", Case/Package=LQFP, Frequency=84MHz, Manufacturer=STMicroelectronics, Max Operating Temperature=85°C, Max Power Dissipation=313mW, Max Supply Voltage=3.6V, Min Operating Temperature=-40°C, Min Supply Voltage=1.7V, Operating Supply Voltage=3.3V, Package Quantity=960, Category=Microcontrollers, ComponentLink1Description=http://www.farnell.com/datasheets/1899788.pdf?src-supplier=Farnell, ComponentLink1URL=http://www.farnell.com/datasheets/1899788.pdf?src-supplier=Farnell, ComponentLink2Description=http://www.mouser.com/ds/2/389/stm32f401re-956236.pdf?src-supplier=Mouser, ComponentLink2URL=http://www.mouser.com/ds/2/389/stm32f401re-956236.pdf?src-supplier=Mouser, ComponentLink3Description=http://www.farnell.com/datasheets/1899788.pdf?src-supplier=Element14, ComponentLink3URL=http://www.farnell.com/datasheets/1899788.pdf?src-supplier=Element14, ComponentLink4Description=http://www.st.com/st-web-ui/static/active/en/resource/technical/document/datasheet/DM00102166.pdf?src-supplier=Avnet, ComponentLink4URL=http://www.st.com/st-web-ui/static/active/en/resource/technical/document/datasheet/DM00102166.pdf?src-supplier=Avnet, ComponentLink5Description=http://www.st.com/content/ccc/resource/technical/document/errata_sheet/df/f5/fd/26/37/db/42/2b/DM00095523.pdf/files/DM00095523.pdf/jcr:content/translations/en.DM00095523.pdf?src-supplier=Digi-Key, ComponentLink5URL=http://www.st.com/content/ccc/resource/technical/document/errata_sheet/df/f5/fd/26/37/db/42/2b/DM00095523.pdf/files/DM00095523.pdf/jcr:content/translations/en.DM00095523.pdf?src-supplier=Digi-Key, ComponentLink6Description=http://www.farnell.com/datasheets/1899788.pdf?src-supplier=Newark, ComponentLink6URL=http://www.farnell.com/datasheets/1899788.pdf?src-supplier=Newark, Core Architecture=ARM, Data Bus Width=32b, Interface=I2C,SPI,USB,IrDA,SDIO,UART,USART,LIN,I2S, Lead Free="Lead Free", Manufacturer Part Number=STM32F401RET6, Max Frequency=84MHz, Memory Size=512KB, Memory Type=FLASH, Number of I/Os=50, Number of Pins=64, Number of Programmable I/O=50, Number of Timers/Counters=8, Oscillator Type=Internal, Packaging=Tray, Peripherals="Brown-out Detect/Reset,POR,PWM,WDT,DMA", Pricing 1="1=9,13, 10=8,26, 50=7,87, 100=6,84, 1000=5,06, 10000=5,06 (USD)", Radiation Hardening=No, RAM Size=96KB, Reach SVHC Compliant=No, RoHS=Yes, RoHS Compliant=Yes, Series="STM32 F4", Stock 1=9195, Supplier 1=Mouser, Watchdog Timer=Yes, Weight=0.012088oz
F2: library part UCLAMP0571P.TNT, "TVS DIODE 5V 15V SGP1610N2", Clamping Voltage=15V, Manufacturer=Semtech, Max Operating Temperature=125°C, Min Breakdown Voltage=6V, Min Operating Temperature=-40°C, Peak Pulse Current=80A, Power Line Protection=No, Resistor Type=Zener, Reverse Standoff Voltage=5V, Category="TVS Diodes", ComponentLink1Description=https://media.digikey.com/pdf/Data%20Sheets/~No%20Display/Semtech%20PDFs/uClamp0571P-3671P.pdf?src-supplier=Digi-Key, ComponentLink1URL=https://media.digikey.com/pdf/Data%20Sheets/~No%20Display/Semtech%20PDFs/uClamp0571P-3671P.pdf?src-supplier=Digi-Key, ComponentLink2Description=http://www.mouser.com/ds/2/761/uclampxx71p_2-779780.pdf?src-supplier=Mouser, ComponentLink2URL=http://www.mouser.com/ds/2/761/uclampxx71p_2-779780.pdf?src-supplier=Mouser, Manufacturer Part Number=UCLAMP0571P.TNT, Mount="Surface Mount", Number of Pins=2, Number of Unidirectional Channels=1, Packaging="Tape and Reel", Pricing 1="1=0,87000, 10=0,75800, 100=0,52470, 500=0,43842, 1000=0,37312, 2000=0,33231, 5000=0,31482 (USD)", RoHS=Yes, Stock 1=30716, Supplier 1=Digi-Key
F3: library part "WE-TVS-HS, 824015", "TVS Diode WE-TVS-HS, VRWM=5V", Manufacturer="Würth Elektronik eiSos GmbH", Reverse Stand Off Voltage=5V, Supplier Part Number 1=1748615, ComponentLink1Description=Manufacturer, ComponentLink1URL=http://www.we-online.de, ComponentLink2Description=Datasheet, ComponentLink2URL=http://katalog.we-online.de/kataloge/eisos/media/pdf/824014.pdf, Created by="Christin Zierenner", Created Date="March 2010", Supplier 1=Farnell, Supplier 2=Digi-Key, Supplier Part Number 2=732-4467-1-ND
K1: "Low Noise, Positive Output LDO, 250 mA, 3.3V", Supplier Part Number 1=296-15812-1-ND, ComponentLink1Description=datasheet, ComponentLink1URL=http://www.ti.com/lit/ds/symlink/tps732.pdf, LatestRevisionDate=15-May-2014, PackageDescription="SOT23, 5-Leads, Body 2,90x2,80mm, Pitch 0,95mm, IPC Medium Density", PackageReference=SOT23-5, Published=15-May-2014, Publisher="Stephan Huber", Supplier 1=Digi-Key
K2: "Low Power Voltage Detector, Open Drain, 2,9 V Threshold, SOT23-3", Supplier Part Number 1=497-4956-1-ND, ComponentLink1Description=Datasheet, ComponentLink1URL=http://www.farnell.com/datasheets/1690459.pdf, Supplier 1=Digi-Key, Supplier 2=Farnell, Supplier 3=Mouser, Supplier Part Number 2=1224452, Supplier Part Number 3=511-STM1061N29WX6F
K3: "CMOS Single AND-Gate, AHC, 2 V - 5.5 V, 8 mA, Ultra High Speed", Supplier Part Number 1=296-1091-1-ND, ComponentLink1Description=Datasheet, ComponentLink1URL=http://www.ti.com/lit/ds/symlink/sn74ahc1g08.pdf, Supplier 1=Digi-Key, Supplier 2=Mouser, Supplier Part Number 2=595-SN74AHC1G08DBVR
P1 P2: library part 150060VS75000, "WL-SMCW LED, green, 30 mA, 2 V, 570 nmr, 0603, Bright Green,  140°", Emitting Color="Bright Green", Forward Voltage="2 V", Operating Temperature="-40 to 85 degC", ComponentLink1Description=Manufacturer, ComponentLink1URL=http://www.we-online.de, ComponentLink2Description=Datasheet, ComponentLink2URL=http://katalog.we-online.de/led/datasheet/150060VS75000.pdf, Dominant Wavelength="570 nm", Luminous Intensity="40 mcd", Part Number=150060VS75000, Peak Wavelength="572 nm", Published Date="March 2018", Publisher="Wurth Elektronik", Size=0603, Viewing Angle=140°
R1 R3 R4 R5 R6 R7 R8 R16: library part CRCW0603100RFKEAHP, "100R, 0603, 0.25 W, 1%, 75 V, pulse proof", Manufacturer=Vishay, Power Rating="0.25 W", Supplier Part Number 1=541-100SCT-ND, Tolerance=1%, Voltage Rating="75 V", ComponentLink1Description=datasheet, ComponentLink1URL=CRCW0603100RFKEAHP, Series="CRCW-HP E3", Supplier 1=Digi-Key, Supplier 2=Farnell, Supplier 3=Mouser, Supplier Part Number 2=1738891, Supplier Part Number 3=71-CRCW0603100RFKEAH
R2 R10: library part CRCW06033K30FKEA, "3k3, 0603, 0.1 W, 1%, 75 V", Manufacturer=Vishay, Power Rating="0.1 W", Tolerance=1%, Voltage Rating="75 V", Series="D/CRCW E3"
R9: library part CRCW06031K00FKEA, "1k, 0603, 0.1 W, 1%, 75 V", Manufacturer=Vishay, Power Rating="0.1 W", Supplier Part Number 1=541-1.00KSCT-ND, Tolerance=1%, Voltage Rating="75 V", ComponentLink1Description=datasheet, ComponentLink1URL=http://www.vishay.com/docs/20043/crcwhpe3.pdf?src-supplier=Digi-Key, Series="D/CRCW E3", Supplier 1=Digi-Key, Supplier 2=Farnell, Supplier Part Number 2=2693105
R11: library part "WE-CNSW 1206, 744232090", "SMD Common Mode Noise Suppressor WE-CNSW,  Z= 90 Ohm", Manufacturer="Würth Elektronik eiSos GmbH", partNo=744232090, Supplier Part Number 1=732-1469-1-ND, ComponentLink1Description=Manufacturer, ComponentLink1URL=http://www.we-online.de, ComponentLink2Description=Datasheet, ComponentLink2URL=http://www.we-online.de/katalog/media/pdf/744232090.pdf, Created by="Christin Zierenner", Created Date="November 2009", Impedance="90 Ohm", Supplier 1=Digi-Key, Supplier 2=Farnell, Supplier 3=Mouser, Supplier Part Number 2=1636474, Supplier Part Number 3=710-744232090
R12 R20: library part CRCW060310K0FKEA, "10k, 0603, 0.1 W, 1%, 75 V", Manufacturer=Vishay, Power Rating="0.1 W", Supplier Part Number 1=541-10.0KSCT-ND, Tolerance=1%, Voltage Rating="75 V", Series="D/CRCW E3", Supplier 1=Digi-Key, Supplier 2=Farnell, Supplier Part Number 2=1738918
R13 R14: library part CRCW06035K10FKEA, "5k1, 0.1 W, 1%, 75 V, 0603", Case Code (Imperial)=0603, Case Code (Metric)=1608, Manufacturer=Vishay, Max Operating Temperature=155°C, Max Power Dissipation=100mW, Min Operating Temperature=-55°C, Package Quantity=5000, Resistance=5.1kR, Resistance Tolerance=1%, Resistor Type="Thick Film", Temperature Coefficient=100ppm/°C, Voltage Rating=75V, Case/Package=0603, Category="Chip SMD Resistors", ComponentLink1Description=https://datasheet.ciiva.com/11809/0900766b80d98afc-11809935.pdf?src-supplier=Rs, ComponentLink1URL=https://datasheet.ciiva.com/11809/0900766b80d98afc-11809935.pdf?src-supplier=Rs, ComponentLink2Description=https://datasheet.ciiva.com/26314/fld-crcw-e3-data-en-26314742.pdf?src-supplier=Distrelec, ComponentLink2URL=https://datasheet.ciiva.com/26314/fld-crcw-e3-data-en-26314742.pdf?src-supplier=Distrelec, ComponentLink3Description=https://datasheet.ciiva.com/7690/1697337-7690728.pdf?src-supplier=Element14, ComponentLink3URL=https://datasheet.ciiva.com/7690/1697337-7690728.pdf?src-supplier=Element14, ComponentLink4Description=https://datasheet.ciiva.com/7690/1720486-7690873.pdf?src-supplier=Element14, ComponentLink4URL=https://datasheet.ciiva.com/7690/1720486-7690873.pdf?src-supplier=Element14, ComponentLink5Description=https://datasheet.ciiva.com/15159/getdatasheetpartid-32793-15159338.pdf?src-supplier=Verical, ComponentLink5URL=https://datasheet.ciiva.com/15159/getdatasheetpartid-32793-15159338.pdf?src-supplier=Verical, ComponentLink6Description=https://datasheet.ciiva.com/3257/dcrcwe3-3257758.pdf?src-supplier=Avnet, ComponentLink6URL=https://datasheet.ciiva.com/3257/dcrcwe3-3257758.pdf?src-supplier=Avnet, ComponentLink7Description=https://datasheet.ciiva.com/16226/dcrcwe3-16226862.pdf?src-supplier=Future+Electronics, ComponentLink7URL=https://datasheet.ciiva.com/16226/dcrcwe3-16226862.pdf?src-supplier=Future+Electronics, Construction=Rectangular, Contact Plating=Tin, Depth=0.85mm, Features="Automotive AEC-Q200", Height=0.45mm, Lead Free="Lead Free", Length=1.55mm, Manufacturer Part Number=CRCW06035K10FKEA, Military Standard=Not, Number of Terminations=2, Packaging="Tape and Reel", Power Rating=100mW, Pricing 1="1=0,1, 10=0,038, 50=0,038, 100=0,016, 1000=0,007, 10000=0,005 (USD)", Radiation Hardening=No, Reach SVHC Compliant=Unknown, RoHS=Yes, RoHS Compliant=Yes, Series=CRCW, Size Code=0603, Stock 1=16936, Supplier 1=Mouser, Technology="THICK FILM", Termination=SMD/SMT, Tolerance=1%, Voltage Rating (DC)=75V, Weight=7.1E-05oz, Width=0.85mm
R15: library part 742792641, "300R / 100 MHz, 2 A, 0R15, WE-CBF", Case Code (Imperial)=0603, Case Code (Metric)=1608, Case/Package=SMD/SMT, Current Rating=2A, Inductance=18nH, Manufacturer="Wurth Electronics", Max Operating Temperature=125°C, Min Operating Temperature=-55°C, Package Quantity=1, Test Frequency=100MHz, Tolerance=25%, Category="Ferrite Beads and Chips", ComponentLink1Description=https://datasheet.ciiva.com/1466/1705830-1466501.pdf?src-supplier=Element14, ComponentLink1URL=https://datasheet.ciiva.com/1466/1705830-1466501.pdf?src-supplier=Element14, ComponentLink2Description=https://datasheet.ciiva.com/4940/742792641-72209-4940450.pdf?src-supplier=Mouser, ComponentLink2URL=https://datasheet.ciiva.com/4940/742792641-72209-4940450.pdf?src-supplier=Mouser, ComponentLink3Description=https://datasheet.ciiva.com/1013/742792641-1013888.pdf?src-supplier=Digi-Key, ComponentLink3URL=https://datasheet.ciiva.com/1013/742792641-1013888.pdf?src-supplier=Digi-Key, ComponentLink4Description=https://datasheet.ciiva.com/11800/0900766b80d2e072-11800409.pdf?src-supplier=Rs, ComponentLink4URL=https://datasheet.ciiva.com/11800/0900766b80d2e072-11800409.pdf?src-supplier=Rs, ComponentLink5Description=https://datasheet.ciiva.com/1466/1705830-1466502.pdf?src-supplier=Element14, ComponentLink5URL=https://datasheet.ciiva.com/1466/1705830-1466502.pdf?src-supplier=Element14, ComponentLink6Description=https://datasheet.ciiva.com/1013/742792641-1013889.pdf?src-supplier=Digi-Key, ComponentLink6URL=https://datasheet.ciiva.com/1013/742792641-1013889.pdf?src-supplier=Digi-Key, Core Material=Ferrite, Depth=0.8mm, Height=0.8mm, Impedance=300R, Lead Free="Lead Free", Length=1.6mm, Manufacturer Part Number=742792641, Material=Ferrite, Max Current Rating=2A, Max DC Current=2A, Mount="Surface Mount", Number of Lines=1, Packaging="Tape and Reel", Pricing 1="500=0,165, 2500=0,149, 5000=0,134, 12500=0,12 (EUR)", Reach SVHC Compliant=Unknown, RoHS=Yes, RoHS Compliant=Yes, Series=WE-CBF, Stock 1=21100, Supplier 1=Rs, Termination=SMD/SMT, Weight=0.000141oz, Width=0.8mm
R17 R18 R19 R21: library part ERA3AEB103V, "10k, 0603, 0.1 W, 0.1%, 75 V", Manufacturer=Panasonic, Power Rating="0.1 W", Tolerance=0.1%, Voltage Rating="75 V", ComponentLink1Description=Datasheet, ComponentLink1URL=http://www.farnell.com/datasheets/2059650.pdf?_ga=1.210016598.299220673.1451381906, Series="Metal Film (Thin Film) Chip Resistors, High Reliability Type"
T1: library part PKLCS1212E4001-R1, "SUMMER, SMD, 4KHZ EXTERN BESCHALTEN", Supplier Part Number 1=1192551, ComponentLink1Description=datasheet, ComponentLink1URL=http://www.farnell.com/datasheets/2157985.pdf?src-supplier=Element14, PackageReference="Lead titanium zirconium oxide (16-Jun-2014)", Supplier 1=Farnell
X1: "Ffc / Fpc Board Connector, Vertical, Surface Mount, Receptacle, 10, 0.5 Mm Rohs Compliant: Yes", Actuator Color=Black, Current Rating=500mA, Flammability Rating="UL94 V-0", Housing Color=Beige, Insulation Resistance=100MR, Manufacturer="Wurth Electronics", Max Operating Temperature=85°C, Min Operating Temperature=-25°C, Package Quantity=1, Voltage Rating=50V, Actuator Material="Polymer,Liquid Crystal Polymer", Category="FFC / FPC", ComponentLink1Description=https://datasheet.ciiva.com/25617/0900766b81113c2b-25617817.pdf?src-supplier=Rs, ComponentLink1URL=https://datasheet.ciiva.com/25617/0900766b81113c2b-25617817.pdf?src-supplier=Rs, ComponentLink2Description=https://datasheet.ciiva.com/8067/1388844-8067302.pdf?src-supplier=Element14, ComponentLink2URL=https://datasheet.ciiva.com/8067/1388844-8067302.pdf?src-supplier=Element14, ComponentLink3Description=https://datasheet.ciiva.com/670/6873xx124422-670422.pdf?src-supplier=Digi-Key, ComponentLink3URL=https://datasheet.ciiva.com/670/6873xx124422-670422.pdf?src-supplier=Digi-Key, ComponentLink4Description=https://datasheet.ciiva.com/670/6873xx124422-670421.pdf?src-supplier=Digi-Key, ComponentLink4URL=https://datasheet.ciiva.com/670/6873xx124422-670421.pdf?src-supplier=Digi-Key, ComponentLink5Description=https://datasheet.ciiva.com/670/6873xx124422-670423.pdf?src-supplier=Digi-Key, ComponentLink5URL=https://datasheet.ciiva.com/670/6873xx124422-670423.pdf?src-supplier=Digi-Key, ComponentLink6Description=https://datasheet.ciiva.com/29317/709154-da-01-en-smd-zif-stecker-180grad-typ-a-10-pol-29317899.pdf?src-supplier=Conrad, ComponentLink6URL=https://datasheet.ciiva.com/29317/709154-da-01-en-smd-zif-stecker-180grad-typ-a-10-pol-29317899.pdf?src-supplier=Conrad, Contact Location=Side, Contact Material=Bronze,Tin, Contact Plating=Tin, Gender=Receptacle, Housing Material="Liquid Crystal Polymer", Lead Free="Lead Free", Length=11.4mm, Manufacturer Part Number=687310124422, Mating Cycles=25, Mount="Surface Mount", Number of Contacts=10, Number of Positions=10, Number of Rows=2, Orientation=Straight, Packaging="Tape and Reel", Pitch=0.5mm, Pricing 1="50=1,608, 250=1,488, 500=1,298, 1250=1,176 (EUR)", Reach SVHC Compliant=Unknown, RoHS=Yes, RoHS Compliant=Yes, Series=WR-FPC, Stock 1=435, Supplier 1=Rs, Termination=Solder, Width=3.5mm
X2: library part 629722000214, "USB 2.0 Type C", Manufacturer="Wurth Electronics", Manufacturer Part Number=629722000214, Pricing 1="1=2,78, 10=2,45, 100=2,3, 250=2,12, 500=2,01, 1000=1,8 (EUR)", RoHS=No, Supplier 1=Farnell
X3: library part "WE-3.00 mm Micro Power Connector 66200221022", "WR-MPC3 3.00 mm Male Dual Row Angled Header with Plastic Pegs", Manufacturer="W¨¹rth Elektronik eiSos GmbH", Supplier Part Number 1=8285940, ComponentLink1 Description=Manufacturer, ComponentLink1Description="New link", ComponentLink1URL=http://www.we-online.com, ComponentLink2 Description=Datasheet, ComponentLink2URL=http://katalog.we-online.de/em/datasheet/6620xx21022.pdf, Created by="Karrer Zheng", Created Date="20 August 2013", NoPins=02, partNo=66200221022, Supplier 1=RSComponents
X4: "JTAG - Adapter Cbl Plug Of Nails 10PIN", Manufacturer=Tag-Connect, ComponentLink1Description=https://datasheet.ciiva.com/2385/tc2050-idc20datasheet-2385406.pdf?src-supplier=Digi-Key, ComponentLink1URL=https://datasheet.ciiva.com/2385/tc2050-idc20datasheet-2385406.pdf?src-supplier=Digi-Key, Manufacturer Part Number=TC2050-IDC, Pricing 1="1=39 (USD)", RoHS=Yes, Series=Plug-Of-Nails™, Stock 1=1744, Supplier 1=Digi-Key

## Via types
v1: diameter 0.8, hole 0.4, Top Layer to Bottom Layer, 47 vias
v2: diameter 0.55, hole 0.25, Top Layer to Bottom Layer, 6 vias

## Nets (pads, with @x,y where several pads share a name; then routed paths per layer and width w, separated by ;. In a path a pad name is that pad's centre, name@x,y a point inside that pad or via, vN(x,y) a via of type N, cw(c..) or ccw(c..) an arc to the next point about the centre after c; other vN are vias at no path point)
+3V3: C2.1 C4.1 C8.1 C12.1 C13.1 C14.1 C15.1 C16.1 C17.1 C19.1 C21.1 C22.1 C23.1 F1.1 F1.13 F1.19 F1.32 F1.48 F1.64 K1.5 K2.3 K3.5 R2.1 R12.1 R17.1 R18.1 R19.1 X1.10 X4.1 | length 64.3
  Top Layer w0.25: v1(43.125,81.025) C16.1 C13.1 46.25,81 47,81 47.55,81.55 F1.48 ; C14.1 48.25,92.695 49.045,91.9 50.303,91.9 50.45,91.754 F1.32 ; F1.64 57.95,79 58.446,78.504 58.446,77.404 C12.1 ; F1.1 F1.1 60.651,81.549 61.75,80.45 C2.1 ; F1.13 60.459,87.55 61.1,88.191 61.1,89.629 61.246,89.775 63.725,89.775 C22.1 ; X1.10 C17.1@76.812,88.975 ; C19.1 76.7,89.088 C17.1@76.812,88.975 ; C17.1 C17.1@76.812,88.975
  Top Layer w0.258: C15.1@56.425,92.975 56.425,92.15 56.947,91.628 56.947,90.944 F1.19
  Top Layer w0.4: K1.5 38.7,70.175 C4.1 ; R2.1 C4.1 ; v1(40.125,70.2) C4.1 ; K3.5 41.925,92.95 41.925,92.444 42.119,92.25 44.149,92.25 44.449,92.55 C21.1 45.429,92.571 45.429,93.887 v1(45.408,93.908) ; v1(43.075,75.9) R19.1@44.475,75.9 ; v1(46.825,95.075) C14.1@48.225,95.075 ; R17.1@48.525,75.95 v1(49.925,75.95) ; v1(54.725,71.3) R18.1 ; C15.1@56.425,93.025 v1(56.425,94.425) ; v1(57.9,71.925) C8.1@59.3,71.925 ; v1(58.575,75.85) C12.1@58.575,77.225 ; C12.1@58.6,77.3 C12.1@58.716,77.416 ; C8.1 60.1,71.95 60.451,71.599 60.6,71.45 K2.3 63.25,71.45 63.8,72 R12.1 ; v1(61.75,78.45) C2.1 ; C22.1@63.975,90.075 v1(63.975,91.475) ; R12.1@64.75,72.025 v1(66.15,72.025) ; C19.1 v1(78.1,90.65)
  Bottom Layer w0.25: v1(42.025,72.175) 43.937,72.175 44.228,71.884 X4.1
+5V: C3.1 F2.1 F3.5 K1.1 K1.3 X2.VBUS | length 14.2
  Top Layer w0.3: v2(31.75,79.2) 32.25,78.7 X2.VBUS@32.975,78.7 ; v2(31.75,83) 32.25,83.5 X2.VBUS@32.975,83.5 ; v2(32.925,74.425) C3.1 ; F2.1 34.363,74.437 C3.1 ; v2(35.2,81.1) F3.5 ; K1.1 36.825,71.776 36.649,71.6 35.1,71.6 34.9,71.8 34.9,72.55 K1.3 34.9,72.6 34.9,73.2 34.5,73.6 34.5,74.3 C3.1
CD_N: F3.4 R11.3 X2.A7 X2.B7 | length 12.1
  Top Layer w0.25: X2.A7 31.618,80.85 31.325,81.143 31.325,81.557 31.618,81.85 32.125,81.85 32.3,81.85 X2.B7 36.5,81.85 36.7,82.05 F3.4 37.425,82.725 38.25,83.55 38.25,84.329 38.396,84.475 R11.3
CD_P: F3.6 R11.2 X2.A6 X2.B6 | length 12.3
  Top Layer w0.25: v2(31.825,80.325) 31.85,80.35 X2.B6 36.5,80.35 36.7,80.15 F3.6 37.45,80.175 38.079,80.175 38.225,80.321 38.225,81.925 39.225,82.925 R11.2 ; v2(31.825,81.35) X2.A6
  Bottom Layer w0.25: v2@31.85,80.325 v2@31.85,81.35
CS: F1.15 R5.2 | length 16.1
  Top Layer w0.25: F1.15 59.224,88.55 58.698,89.076 58.698,89.293 62.08,92.675 64.72,92.675 67.1,90.295 67.1,88.375 67.85,87.625 R5.2
DRDY: F1.14 R4.2 | length 15.8
  Top Layer w0.25: F1.14 59.223,88.05 58.278,88.995 58.278,89.368 61.935,93.025 64.865,93.025 68.59,89.3 R4.2
GND: C1.1 C2.2 C3.2 C4.2 C5.2 C6.1 C7.1 C8.2 C9.2 C10.2 C11.2 C12.2 C13.2 C14.2 C15.2 C16.2 C17.2 C19.2 C21.2 C22.2 C23.2 F1.12 F1.18 F1.31 F1.47 F1.63 F2.2 F3.2 K1.2 K2.2 K3.3 P1.1 P2.1 R13.2 R14.2 R20.2 R21.2 T1.2 X1.2 X1.4 X2.GND X3.2 X4.3 X4.5 X4.9 | length 82.4
  Top Layer w0.25: F3.2 v1(41.6,81.1) ; v1(43.1,82.5) 44.5,82.5 C16.2 C13.2 ; C13.2@46.225,82.575 46.25,82.6 47,82.6 47.55,82.05 F1.47 ; R21.2 46.375,66.66 v1(46.375,67.925) ; C11.2 49.725,93.15 50.25,92.625 50.35,92.625 50.95,92.025 F1.31 ; C12.2 56.825,78.319 57.45,78.944 F1.63 ; F1.18 57.45,91.56 57.6,91.71 57.6,91.72 57.9,92.02 57.9,92.95 C15.2 ; C8.2 60.175,73.45 60.546,73.821 61.046,73.821 K2.2 61.075,75.35 C9.2 ; F1.12 61.825,87.05 62.108,87.333 C23.2 ; X1.2 X1.4 76.525,91.975 C19.2
  Top Layer w0.4: v1(29.4,87.1) C7.1 ; v1(31.375,71.925) C5.2 ; X2.GND@32.975,77.9 33.058,77.983 34.518,77.983 R14.2 34.665,78 35.353,78 35.588,77.766 F2.2 35.675,76.263 35.675,74.825 C3.2 35.875,74.225 K1.2 ; X2.GND@32.975,84.3 34.091,84.3 34.325,84.066 34.325,84.035 34.525,83.835 R13.2 v1(34.6,85.235) ; v1(35.725,65.925) P1.1 ; C3.2@36.1,74.45 v1(37.425,74.45) ; C4.2@38.75,71.925 v1(40.15,71.925) ; C10.2@39.575,88.85 v1(39.575,90.25) ; v1(43.45,86.4) 44.515,86.4 P2.1 ; v1(43.725,88.975) K3.3 ; v1(45.45,89.65) C21.2 ; C11.2 49.75,93.275 C14.2 ; C14.2@49.775,95.125 v1(51.175,95.125) ; v1(54.9,75.1) 55.037,75.238 55.037,76.253 R20.2@55.1,76.315 ; v1(56.825,75.85) 56.825,77.225 C12.2@56.85,77.25 ; v1(57.9,73.425) C8.2@59.3,73.425 ; C15.2 v1(57.95,94.4) ; C23.2 63.925,88.275 C22.2 ; C2.2@63.275,79.575 63.3,79.55 v1(63.3,78.4) ; C22.2@64.025,88.375 64.1,88.3 v1(65.5,88.3) ; C1.1 66.275,81.15 66.275,82.225 66.675,82.625 66.675,83.75 v1@66.55,83.875 ; C1.1@66.275,81.1 66.525,81.35 C1.1@66.525,81.434 ; C6.1@66.525,86.35 66.275,86.6 66.25,86.575 66.25,85.75 66.675,85.325 v1(66.675,83.875) ; v1(73.3,65.75) T1.2 ; C19.2 v1(78.1,92.15) ; C17.2 76.887,87.25 v1(78.25,87.25)
  Bottom Layer w0.25: v1(46.375,67.925) 46.375,70.569 X4.9 X4.3 ; X4.5 50.14,72.002 50.652,72.514 50.652,72.884 51.55,73.783 v1(51.55,74.375)
INT1: F1.20 R8.2 | length 15.4
  Top Layer w0.25: F1.20 56.45,90.324 56.802,89.972 58.387,89.972 61.79,93.375 65.3,93.375 67.85,90.825 R8.2
INT2: F1.16 R1.2 | length 15.4
  Top Layer w0.25: F1.16 60.603,89.05 60.75,89.198 60.75,90.85 62.225,92.325 64.575,92.325 66.75,90.15 66.75,88.2 67.356,87.594 67.356,86.67 68.001,86.025 R1.2
MISO: F1.22 R6.2 | length 18.5
  Top Layer w0.25: F1.22 55.45,92.005 55.025,92.43 55.025,94.675 55.975,95.625 66.275,95.625 67.85,94.05 68.565,94.05 R6.2
MOSI: F1.23 R3.2 | length 18.5
  Top Layer w0.25: F1.23 54.95,92.01 54.675,92.285 54.675,94.82 55.83,95.975 67.4,95.975 67.725,95.65 68.565,95.65 R3.2
NetB1_1: B1.1 C6.2 F1.6 | length 6.9
  Top Layer w0.25: F1.6 61.775,84.05 62.516,84.791 64.479,84.791 64.488,84.8 B1.1 64.675,84.825 C6.2
NetB1_2: B1.2 C1.2 F1.5 | length 6.9
  Top Layer w0.25: F1.5 61.775,83.55 62.425,82.9 B1.2 64.675,82.875 C1.2
NetC5_1: C5.1 K1.4 | length 2
  Top Layer w0.4: C5.1 K1.4
NetC7_2: C7.2 X2.1 | length 18.7
  Top Layer w0.4: X2.1@32.41,85.42 32.43,85.44 32.43,87.08 C7.2
  Bottom Layer w0.4: X2.1@32.41,76.78 28.23,76.78 28.23,85.42 X2.1@32.41,85.42
NetC9_1: C9.1 F1.7 K2.1 R12.2 | length 15.6
  Top Layer w0.25: F1.7 59.223,84.55 58.825,84.152 58.825,80.393 62.621,76.597 62.621,75.704 C9.1 62.775,74.85 62.975,74.65 K2.1 63.025,73.8 63.025,73.321 63.171,73.175 64.615,73.175 R12.2
NetC10_1: C10.1 F3.3 R15.2 R16.1 | length 11.7
  Top Layer w0.4: R16.1 C10.1 ; F3.3 39.925,82.725 40.3,83.1 40.3,85.5 39.7,86.1 39.7,86.975 C10.1 ; R15.2@41.825,87.075 C10.1
NetC11_1: C11.1 F1.30 | length 2.3
  Top Layer w0.25: F1.30 51.45,93.225 C11.1
NetF1_41: F1.41 R9.1 | length 28.9
  Top Layer w0.25: F1.41 53.673,85.05 60.1,78.623 v1(60.1,77.1) ; v1(65.8,77.1) 68.7,80 R9.1
  Bottom Layer w0.25: v1(60.1,77.1) v1(65.8,77.1)
NetF1_42: F1.42 R10.2 | length 4
  Top Layer w0.25: R10.2@45.633,86.665 45.675,86.665 45.925,86.415 45.925,86.05 47.425,84.55 F1.42
NetF1_46: F1.46 R19.2 X4.2 | length 13.4
  Top Layer w0.25: v1(45.8,74.275) 45.8,75.91 R19.2 45.785,76.924 49.775,80.914 49.775,81.948 49.327,82.397 49.177,82.546 49.177,82.549 49.176,82.55 F1.46
  Bottom Layer w0.25: v1(45.8,74.275) 46.33,73.745 X4.2
NetF1_49: F1.49 R17.2 X4.4 | length 10.6
  Top Layer w0.25: v1(47.225,74.275) 47.225,75.915 R17.2 47.225,75.935 47.225,76.8 47.6,77.175 48.975,77.175 50.45,78.65 F1.49
  Bottom Layer w0.25: v1(47.225,74.275) 47.225,73.529 X4.4
NetF1_50: F1.50 R21.1 X4.8 | length 21.1
  Top Layer w0.25: v1(47.575,67.925) 47.575,66.625 R21.1 50.175,66.6 52.325,68.75 52.325,74.725 50.95,76.1 F1.50
  Bottom Layer w0.25: v1(47.575,67.925) 47.575,70.589 X4.8
NetF1_55: F1.55 R18.2 X4.6 | length 12
  Top Layer w0.25: v1(53.45,71.275) F1.55
  Bottom Layer w0.25: X4.6 50.306,70.614 50.967,71.275 v1(53.45,71.275) v1@53.5,71.275
NetF1_56: F1.56 X4.10 | length 27.4
  Top Layer w0.25: v1(45.025,66.55) 45.025,65.821 45.171,65.675 50.875,65.675 55.5,70.3 55.5,73.3 53.95,74.85 F1.56
  Bottom Layer w0.25: v1(45.025,66.55) 45.025,67.893 45.241,68.108 45.241,69.31 45.06,69.491 X4.10
NetF1_60: F1.60 R20.1 | length 2.4
  Top Layer w0.25: R20.1 55.162,77.712 55.162,78.254 55.949,79.04 55.95,79.042 F1.60
NetK3_1: K3.1 K3.2 R15.1 | length 2.7
  Top Layer w0.4: R15.1 K3.1 K3.2
NetP1_2: P1.2 R2.2 | length 1.4
  Top Layer w0.4: P1.2 37.33,67.32 38.72,67.32 R2.2
NetP2_2: P2.2 R10.1 | length 1.4
  Top Layer w0.25: P2.2 45.91,87.99 R10.1
NetR1_1: R1.1 X1.6 | length 18
  Top Layer w0.25: R1.1 78.25,86.025 78.9,86.675 78.9,90.875 78.375,91.4 75.8,91.4 75.375,90.975 X1.6
NetR3_1: R3.1 X1.3 | length 6.9
  Top Layer w0.25: R3.1 72.343,95.625 73.3,94.668 73.3,93.2 72.575,92.475 X1.3
NetR4_1: R4.1 X1.9 | length 2.3
  Top Layer w0.25: R4.1 70.55,89.225 70.8,89.475 X1.9
NetR5_1: R5.1 X1.7 | length 5.8
  Top Layer w0.25: R5.1 69.875,87.7 70.975,88.8 72.618,88.8 73,89.182 73,90.05 72.65,90.4 72.575,90.475 X1.7
NetR6_1: R6.1 X1.1 | length 2.4
  Top Layer w0.25: R6.1 69.9,94 70.425,94 70.95,93.475 X1.1
NetR7_1: R7.1 X1.5 | length 2.6
  Top Layer w0.25: R7.1 69.875,92.35 70.75,91.475 X1.5
NetR8_1: R8.1 X1.8 | length 5.4
  Top Layer w0.25: R8.1 70.725,90.825 70.875,90.975 73.275,90.975 74.275,89.975 X1.8
NetR9_2: R9.2 T1.1 | length 1.6
  Top Layer w0.25: T1.1 73.3,79.935 R9.2@73.315,79.95
NetR13_1: R13.1 X2.A5 | length 1.7
  Top Layer w0.3: X2.A5 34.4,82.35 R13.1
NetR14_1: R14.1 X2.B5 | length 1.6
  Top Layer w0.3: X2.B5 R14.1
NetR16_2: R16.2 X3.1 | length 4.5
  Top Layer w0.4: X3.1 34.315,91.585 R16.2
SCLK: F1.21 R7.2 | length 18.5
  Top Layer w0.25: F1.21 55.95,92 55.375,92.575 55.375,94.53 56.07,95.225 65.15,95.225 67.9,92.475 68.54,92.475 R7.2
TRGIN: F1.33 K3.4 | length 10.9
  Top Layer w0.25: K3.4 43.725,93.925 44.5,94.7 46.1,94.7 46.7,94.1 46.7,89.7 47.35,89.05 F1.33
USB_N: F1.44 R11.4 | length 7
  Top Layer w0.25: R11.4 46.977,84.475 47.902,83.55 F1.44 ; F1.44@48.559,83.554 F1.44@48.588,83.554
USB_P: F1.45 R11.1 | length 6.8
  Top Layer w0.25: R11.1 47.265,83.475 47.69,83.05 F1.45
pads on no net: F1.2 F1.3 F1.4 F1.8 F1.9 F1.10 F1.11 F1.17 F1.24 F1.25 F1.26 F1.27 F1.28 F1.29 F1.34 F1.35 F1.36 F1.37 F1.38 F1.39 F1.40 F1.43 F1.51 F1.52 F1.53 F1.54 F1.57 F1.58 F1.59 F1.61 F1.62 F3.1 X1.MP1 X1.MP2 X1.MP3 X1.MP4 X2. X2.A8 X2.B8 X3. X4.7 X4.11 X4.12 X4.13 X4.14 X4.15 X4.16 X4.17

## Polygon pours and split planes (outlines as drawn)
+3V3 on 3V3 "+3V3_L02_P006" (solid, pour order 6): 25.4,99 80.4,99 80.4,64 25.4,64
no net on 3V3 "NONET_L02_P008" (solid, pour order 8): 59.1,84.6 59.1,84.2 61.7,84.2 62.5,85 63.3,85 63.3,87.3 67.2,87.3 67.2,80.4 63.3,80.4 63.3,82.7 62.4,82.7 61.7,83.4 59.1,83.4 59.1,83 61.6,83 62.3,82.3 62.9,82.3 62.9,80 67.6,80 67.6,87.7 62.9,87.7 62.9,85.4 62.5,85.4 61.7,84.6
no net on 3V3 "NONET_L02_P007" (solid, pour order 7): 59.1,84.2
+5V on 3V3 "+5V_L02_P005" (solid, pour order 5): 36,84 30.75,84 30.75,72.75 36,72.75
GND on GND "GND_L03_P004" (solid, pour order 4): 25.4,99 80.4,99 80.4,64 25.4,64

## Keep-outs
Top Layer:
  region: 80.4,64 80.4,99 79.4,99 79.4,64
  rectangle: 25.4,98 80.4,99
  rectangle: 25.4,64 80.4,65

## Other copper
3V3:
  pour cut-out: 59.1,84.6 61.7,84.6 62.5,85.4 62.9,85.4 62.9,87.7 67.6,87.7 67.6,80 62.9,80 62.9,82.3 62.3,82.3 61.6,83 59.1,83 59.1,83.4 61.7,83.4 62.4,82.7 63.3,82.7 63.3,80.4 67.2,80.4 67.2,87.3 63.3,87.3 63.3,85 62.5,85 61.7,84.2 59.1,84.2
GND:
  pour cut-out: 59.1,84.6 61.7,84.6 62.5,85.4 62.9,85.4 62.9,87.7 67.6,87.7 67.6,80 62.9,80 62.9,82.3 62.3,82.3 61.6,83 59.1,83 59.1,83.4 61.7,83.4 62.4,82.7 63.3,82.7 63.3,80.4 67.2,80.4 67.2,87.3 63.3,87.3 63.3,85 62.5,85 61.7,84.2 59.1,84.2

## Silkscreen, mask and mechanical layers (free items; w line width, h text height)
Top Overlay:
  text "3V3" at 30.454,66.604 h1.52

## Dimensions
25.4,99 to 25.4,64 on Bottom Layer
25.4,99 to 80.4,99 on Bottom Layer

## Text inside footprints (layer, text, board x,y; h text height)
*1: Top Overlay "MIBE" at 57.4,65.1 h1.1 r90